# Altium PCB ay_and_dac_vm1.PcbDoc
Units mm, origin at the board's own origin, x right, y up, seen from the top; angles counter-clockwise.
Board outline 100 x 200 mm, 2 copper layers (Top Layer, Bottom Layer); 54 components, 122 nets, 529 pads, 0 vias.
Unrouted connection lines stored in the file: 286.
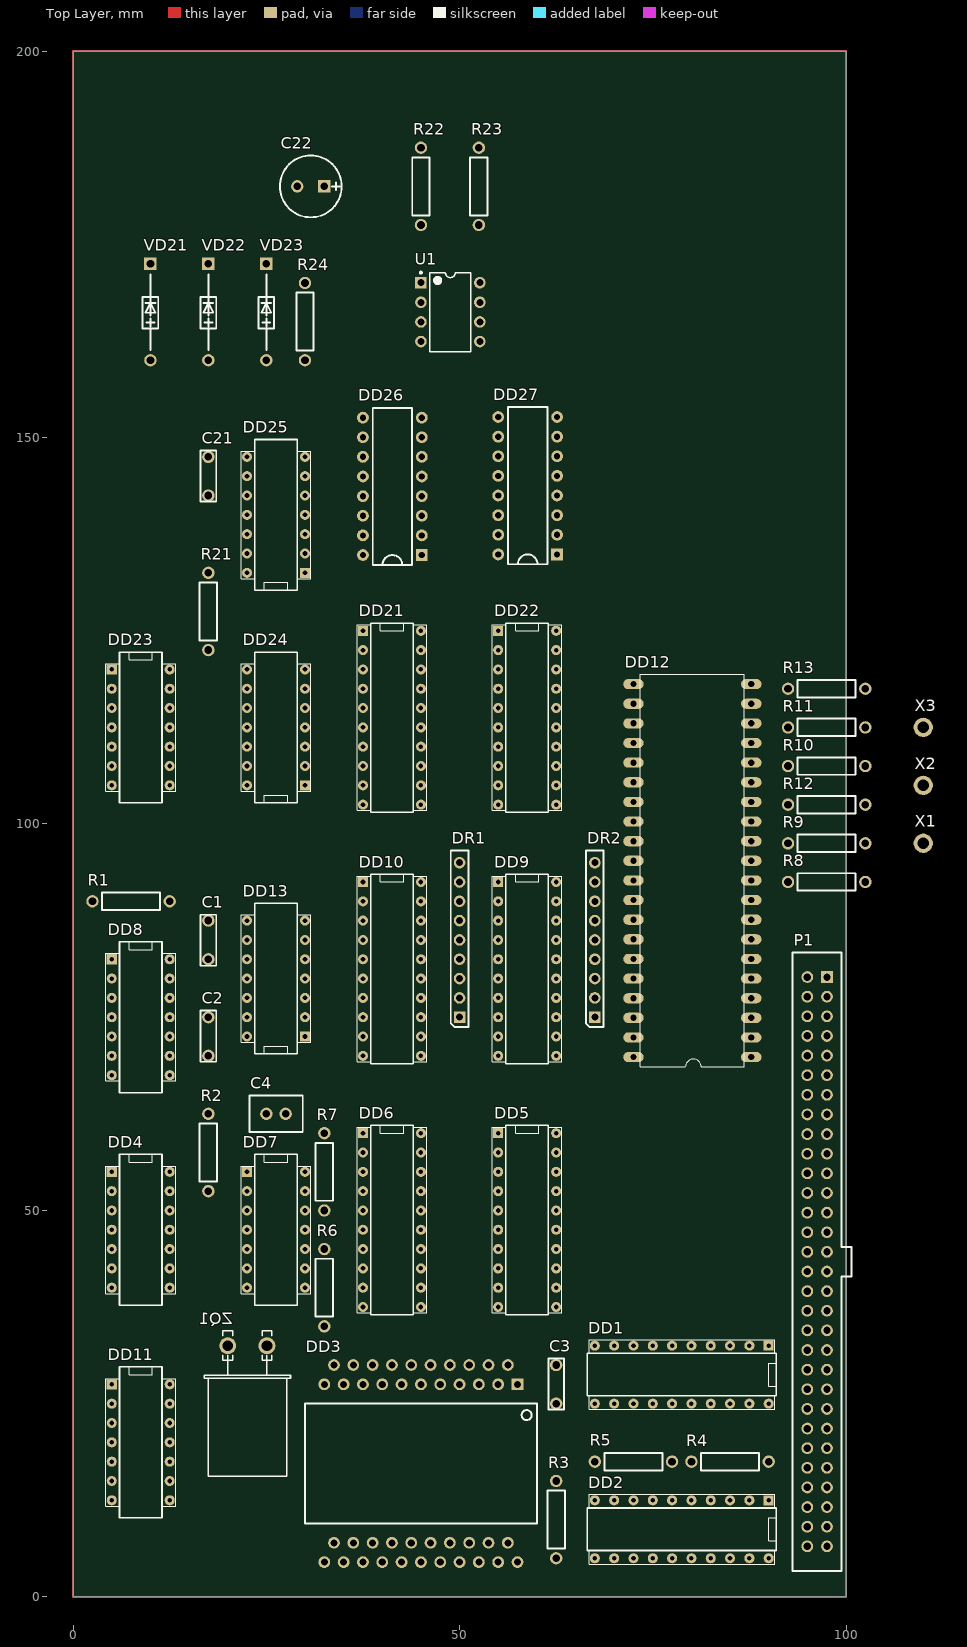
[diagram p0: Top Layer view]
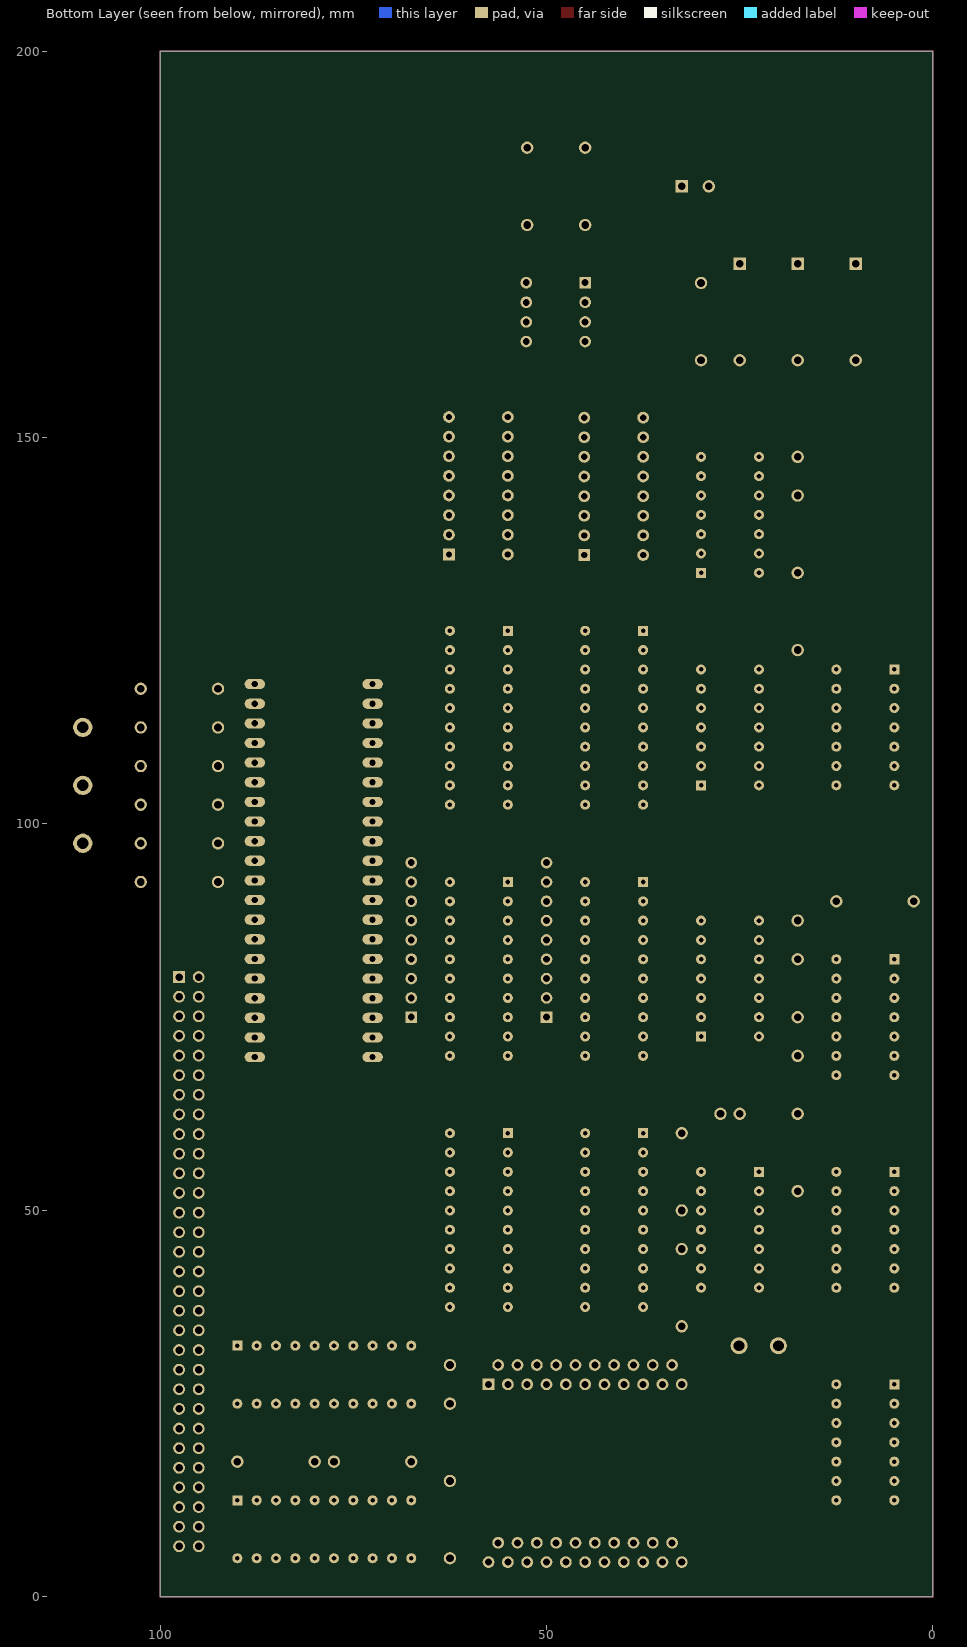
[diagram p1: Bottom Layer view, seen from below]

## Layer stack, top to bottom
Top Solder: solder mask 0.0102, Solder Resist, Dk 3.5
Top Layer: signal copper 0.0356
Dielectric 1: dielectric 0.32, FR-4, Dk 4.8
Bottom Layer: signal copper 0.0356
Bottom Solder: solder mask 0.0102, Solder Resist, Dk 3.5

## Board outline
0,0 0,200 100,200 100,0

## Design rules (kind name [scope] priority, off if disabled: settings)
Clearance [All] p1: gap=0.254 ignorepadtopadclearanceinfootprint=FALSE except(0: Arc-Hole Track-Hole SMDPad-Hole THPad-Hole Via-Hole Fill-Hole Poly-Hole Region-Hole Text-Hole)
PolygonConnect [All] p1: connectstyle=Relief reliefconductorwidth=0.254 reliefentries=4 polygonreliefangle="90 Angle" airgapwidth=0.254
RoutingVias [All] p1: holewidth=0.711 width=1.27 viastyle="Through Hole" minholewidth=0.711 minwidth=1.27 maxholewidth=0.711 maxwidth=1.27
SolderMaskExpansion [All] p1: expansion=0.102
Width [All] p1: maxlimit=0.254 minlimit=0.254 preferedwidth=0.254
30 further rules are at their usual default settings.

## Components (designator, comment, footprint, x,y, rotation, side; value= is the part's Value field where it differs from the comment)
C1 "K1017-1" K1017-1_K1017-1A 17.5,87.5 r270 top value="200 pF"
C2 "K1017-1" K1017-1_K1017-1A 17.5,70 r90 top value="200 pF"
C3 "K1017-1" K1017-1_K1017-1A 62.5,25 r90 top value="1 uF"
C4 "K1017A" K1017A 25,62.5 r0 top value=82pF
C21 "K1017-1" K1017-1_K1017-1A 17.5,142.5 r90 top value="100 pF"
C22 "ECR-8" ECR-8 32.5,182.5 r180 top value=47uF
DD1 "КР1533АП6" 2140.20-4 90,32.5 r0 top
DD2 "КР1533АП6" 2140.20-4 90,12.5 r0 top
DD3 "К1801ВМ1" 429-42 57.5,27.5 r270 top
DD4 "КР1533ЛЕ4" 2101.14-1 5,55 r90 top
DD5 "КР1533ИР23" 2140.20-4 55,60 r90 top
DD6 "КР1533ИР23" 2140.20-4 37.5,60 r90 top
DD7 "КР1533ЛН1" 2101.14-1 22.5,55 r90 top
DD8 "КР1533ЛН2" 2101.14-1 5,82.5 r90 top
DD9 "КР1533ИР23" 2140.20-4 55,92.5 r90 top
DD10 "КР1533ИР23" 2140.20-4 37.5,92.5 r90 top
DD11 "КР1533ЛИ1" 2101.14-1 5,27.5 r90 top
DD12 "AY-3-8910" DIL40 80.12,93.97 r90 top
DD13 "КР1533ИЕ5" 2101.14-1 30,72.5 r270 top
DD21 "КР1533ИР23" 2140.20-4 37.5,125 r90 top
DD22 "КР1533ИР23" 2140.20-4 55,125 r90 top
DD23 "КР1533ЛЕ4" 2101.14-1 5,120 r90 top
DD24 "КР1533ЛА3" 2101.14-1 30,105 r270 top
DD25 "КР1533ТМ2" 2101.14-1 30,132.5 r270 top
DD26 "К572ПА1А" DIP16-3 45.12,134.8 r180 top
DD27 "К572ПА1А" DIP16-3 62.62,134.88 r180 top
DR1 "NR1-4-8M" NR1-4-8M 50,75 r90 top
DR2 "NR1-4-8M" NR1-4-8M 67.5,75 r90 top
P1 "IDC2X30F" IDC60F 97.54,80.2 r270 top
R1 "R0125" R0125_Primary 12.5,90 r180 top value="2 k"
R2 "R0125" R0125_Primary 17.5,62.5 r270 top value="2 k"
R3 "R0125" R0125_Primary 62.5,5 r90 top value=2k
R4 "R0125" R0125_Primary 90,17.5 r180 top value=10k
R5 "R0125" R0125_Primary 67.5,17.5 r0 top value=10k
R6 "R0125" R0125_Primary 32.5,45 r270 top value=750
R7 "R0125" R0125_Primary 32.5,60 r270 top value=1k
R8 "R0125" R0125_Primary 92.5,92.5 r0 top value=1k
R9 "R0125" R0125_Primary 92.5,97.5 r0 top value=2.2k
R10 "R0125" R0125_Primary 92.5,107.5 r0 top value=2.2k
R11 "R0125" R0125_Primary 92.5,112.5 r0 top value=1k
R12 "R0125" R0125_Primary 102.5,102.5 r180 top value=510
R13 "R0125" R0125_Primary 102.5,117.5 r180 top value=510
R21 "R0125" R0125_Primary 17.5,122.5 r90 top value=150
R22 "R0125" R0125_Primary 45,177.5 r90 top value=10k
R23 "R0125" R0125_Primary 52.5,177.5 r90 top value=10k
R24 "R0125" R0125_Primary 30,160 r90 top value=2k
U1 "MC1458P" TI-P8 48.81,166.23 r0 top
VD21 "KD522" VDD10_12.5mm 10,172.5 r90 top
VD22 "KD522" VDD10_12.5mm 17.5,172.5 r90 top
VD23 "KD522" VDD10_12.5mm 25,172.5 r90 top
X1 "KONT-2,5" KONT-2 110,97.5 r270 top value=L
X2 "KONT-2,5" KONT-2 110,105 r270 top value=GND
X3 "KONT-2,5" KONT-2 110,112.5 r270 top value=R
ZQ1 "РК8" МА_РК8(Primary) 20,32.5 r270 top value=14MHz

## Footprints (in the part's own frame and the unit in brackets; to place one, negate y for a bottom-side part, rotate by r counter-clockwise, add the part's x,y. Pads: shape width x height; smd on the part's side, far side on the other; paste and mask are expansions set on the pad)
429-42 [mil]
  rect 60x60 hole 36: 1(0,0)
  round 60 hole 36: 2(-98.43,-49.21) 3(0,-98.43) 4(-98.43,-147.64) 5(0,-196.85) 6(-98.43,-246.06) 7(0,-295.28) 8(-98.43,-344.49) 9(0,-393.7) 10(-98.43,-442.91) 11(0,-492.13) 12(-98.43,-541.34) 13(0,-590.55) 14(-98.43,-639.76) 15(0,-688.98) 16(-98.43,-738.19) 17(0,-787.4) 18(-98.43,-836.61) 19(0,-885.83) 20(-98.43,-935.04) 21(0,-984.25) 22(905.51,-984.25) 23(807.09,-935.04) 24(905.51,-885.83) 25(807.09,-836.61) 26(905.51,-787.4) 27(807.09,-738.19) 28(905.51,-688.98) 29(807.09,-639.76) 30(905.51,-590.55) 31(807.09,-541.34) 32(905.51,-492.13) 33(807.09,-442.91) 34(905.51,-393.7) 35(807.09,-344.49) 36(905.51,-295.28) 37(807.09,-246.06) 38(905.51,-196.85) 39(807.09,-147.64) 40(905.51,-98.43) 41(807.09,-49.21) 42(905.51,0)
  silkscreen extent 98,-1083 709,98
2101.14-1 [mm]
  rect 1.3x1.3 hole 0.6: 1(0,0)
  round 1.3 hole 0.6: 2(-2.5,0) 3(-5,0) 4(-7.5,0) 5(-10,0) 6(-12.5,0) 7(-15,0) 8(-15,-7.5) 9(-12.5,-7.5) 10(-10,-7.5) 11(-7.5,-7.5) 12(-5,-7.5) 13(-2.5,-7.5) 14(0,-7.5)
  silkscreen extent -17.25,-8.25 2.25,0.75
2140.20-4 [mm]
  rect 1.3x1.3 hole 0.6: 1(0,0)
  round 1.3 hole 0.6: 2(-2.5,0) 3(-5,0) 4(-7.5,0) 5(-10,0) 6(-12.5,0) 7(-15,0) 8(-17.5,0) 9(-20,0) 10(-22.5,0) 11(-22.5,-7.5) 12(-20,-7.5) 13(-17.5,-7.5) 14(-15,-7.5) 15(-12.5,-7.5) 16(-10,-7.5) 17(-7.5,-7.5) 18(-5,-7.5) 19(-2.5,-7.5) 20(0,-7.5)
  silkscreen extent -23.5,-8.25 1,0.75
DIL40 [mil]
  oval 52x104 hole 32: 1(-950,-300) 2(-850,-300) 3(-750,-300) 4(-650,-300) 5(-550,-300) 6(-450,-300) 7(-350,-300) 8(-250,-300) 9(-150,-300) 10(-50,-300) 11(50,-300) 12(150,-300) 13(250,-300) 14(350,-300) 15(450,-300) 16(550,-300) 17(650,-300) 18(750,-300) 19(850,-300) 20(950,-300) 21(950,300) 22(850,300) 23(750,300) 24(650,300) 25(550,300) 26(450,300) 27(350,300) 28(250,300) 29(150,300) 30(50,300) 31(-50,300) 32(-150,300) 33(-250,300) 34(-350,300) 35(-450,300) 36(-550,300) 37(-650,300) 38(-750,300) 39(-850,300) 40(-950,300)
  silkscreen extent -1000,-265 1000,265
DIP16-3 [mil]
  rect 60x60 hole 32: 1(0,0)
  round 60 hole 32: 2(0,-100) 3(0,-200) 4(0,-300) 5(0,-400) 6(0,-500) 7(0,-600) 8(0,-700) 9(300,-700) 10(300,-600) 11(300,-500) 12(300,-400) 13(300,-300) 14(300,-200) 15(300,-100) 16(300,0)
  silkscreen extent 50,-750 250,50
ECR-8 [mm]
  rect 1.6x1.6 hole 1: 1(0,0)
  round 1.6 hole 1: 2(3.5,0)
  silkscreen extent -2.25,-4 5.75,4
IDC60F [mil]
  rect 60x60 hole 38: 1(0,0)
  round 60 hole 38: 2(0,-100) 3(100,0) 4(100,-100) 5(200,0) 6(200,-100) 7(300,0) 8(300,-100) 9(400,0) 10(400,-100) 11(500,0) 12(500,-100) 13(600,0) 14(600,-100) 15(700,0) 16(700,-100) 17(800,0) 18(800,-100) 19(900,0) 20(900,-100) 21(1000,0) 22(1000,-100) 23(1100,0) 24(1100,-100) 25(1200,0) 26(1200,-100) 27(1300,0) 28(1300,-100) 29(1400,0) 30(1400,-100) 31(1500,0) 32(1500,-100) 33(1600,0) 34(1600,-100) 35(1700,0) 36(1700,-100) 37(1800,0) 38(1800,-100) 39(1900,0) 40(1900,-100) 41(2000,0) 42(2000,-100) 43(2100,0) 44(2100,-100) 45(2200,0) 46(2200,-100) 47(2300,0) 48(2300,-100) 49(2400,0) 50(2400,-100) 51(2500,0) 52(2500,-100) 53(2600,0) 54(2600,-100) 55(2700,0) 56(2700,-100) 57(2800,0) 58(2800,-100) 59(2900,0) 60(2900,-100)
  silkscreen extent -125,-175 3025,125
K1017-1_K1017-1A [mm]
  round 1.6 hole 1: 1(0,0) 2(5,0)
  silkscreen extent -0.76,-1.02 5.84,1.02
K1017A [mm]
  round 1.6 hole 1: 1(0,0) 2(2.5,0)
  silkscreen extent -2.2,-2.33 4.71,2.35
KONT-2 [mm]
  round 2.5 hole 1.5: 1(0,0)
NR1-4-8M [mm]
  rect 1.5x1.5 hole 0.9: 1(0,0)
  round 1.5 hole 0.9: 2(2.5,0) 3(5,0) 4(7.5,0) 5(10,0) 6(12.5,0) 7(15,0) 8(17.5,0) 9(20,0)
  silkscreen extent -1.27,-1.14 21.59,1.14
R0125_Primary [mm]
  round 1.6 hole 1: 1(0,0) 2(10,0)
  silkscreen extent 1.25,-1.12 8.75,1.12
TI-P8 [mm] "DIP, 8-Leads, Body 9.59x6.35mm, Pitch 2.54mm"
  rect 1.5x1.5 hole 0.9: 1(-3.81,3.81)
  round 1.5 hole 0.9: 2(-3.81,1.27) 3(-3.81,-1.27) 4(-3.81,-3.81) 5(3.81,-3.81) 6(3.81,-1.27) 7(3.81,1.27) 8(3.81,3.81)
  silkscreen extent -3.93,-5.1 2.65,5.23, body extent -3.95,-5.07 3.95,5.07, height 5.08
VDD10_12.5mm [mm]
  rect 1.6x1.6 hole 1: 1(0,0)
  round 1.6 hole 1: 2(-12.5,0)
  silkscreen extent -11.19,-1.02 -1.37,1.02
МА_РК8(Primary) [mm]
  round 2.2 hole 1.4: A(0,0) B(0,5.08)
  silkscreen extent -1.91,-3.05 16.89,8.13

## Part data
DD3: library part K1801VM1
DD26 DD27: library part К572ПА1
P1: "IDC Header"
U1: "Dual General-Purpose Operational Amplifier, 10 to 30 V, 0 to 70 degC, 8-pin DIP (P8), Pb-Free (RoHS)", Manufacturer="Texas Instruments", Supplier Part Number 1=296-1403-5-ND, Total Supply Voltage(Max)(+5V is 5, +/-5V is 10)=30, Total Supply Voltage(Min)(+5V is 5, +/-5V is 10)=10, CMRR(Min)(dB)=70, Code_JEDEC=MS-001, ComponentLink1Description="Manufacturer URL", ComponentLink1URL=http://www.ti.com/, ComponentLink2Description=Datasheet, ComponentLink2URL=http://www.ti.com/lit/ds/symlink/mc1458.pdf, ComponentLink3Description="Package Specification", ComponentLink3URL=http://www.ti.com/litv/pdf/mpdi001b, DatasheetVersion=SLOS069C, Eco-Plan="Pb-Free (RoHS)", GBW(Typ)(MHz)=1, IIB(Max)(pA)=500000, Iq per channel(Max)(mA)=2.8, Mounting Technology="Through Hole", Number of Channels=2, PackageDescription="8-Pin Plastic In-Line, Body 9.59 x 6.35 mm, Pitch 2.54 mm", PackageReference=P8, PackageVersion="4040082/E, 04/2010", PartNumber=MC1458P, Slew Rate(Typ)(V/us)=0.5, Sub Family="General Purpose Amplifier, High Supply Voltage Amplifier (>=30V)", Supplier 1=Digi-Key, Supplier 2=Farnell, Supplier 3=Newark, Supplier 4=Mouser, Supplier Part Number 2=1103044, Supplier Part Number 3=60K6206, Supplier Part Number 4=595-MC1458P, Vio (25C)(Max)(mV)=6, Vn at 1kHz(Typ)(nV/rtHz)=45
ZQ1: "Capacitor"
C1 C2 C3 C21: PDIF_TY=11213
R1 R2 R3 R4 R5 R6 R7 R8 R9 R10 R11 R12 R13 R21 R22 R23 R24: PDIF_TY=11107

## Nets (pads, with @x,y where several pads share a name; then routed paths per layer and width w, separated by ;. In a path a pad name is that pad's centre, name@x,y a point inside that pad or via, vN(x,y) a via of type N, cw(c..) or ccw(c..) an arc to the next point about the centre after c; other vN are vias at no path point)
+5: C3.1 DD3.42 DD12.25 DD12.28 DD12.40 DD25.1 DD25.4 DD26.15 DD27.15 DR1.1 DR2.1 R1.2 R2.2 R3.2 R4.1 R5.1 R24.2 U1.8
ACLO: DD3.30 P1.34
AD0: DD1.18 DD3.9 DD5.3 DD9.2 DD22.3 DD25.2
AD1: DD1.17 DD3.10 DD5.4 DD9.5 DD22.4
AD2: DD1.16 DD3.11 DD5.7 DD9.6 DD22.7
AD3: DD1.15 DD3.12 DD5.8 DD9.9 DD22.8
AD4: DD1.14 DD3.13 DD5.13 DD9.12 DD22.13
AD5: DD1.13 DD3.14 DD5.14 DD9.15 DD22.14
AD6: DD1.12 DD3.15 DD5.17 DD9.16 DD22.17
AD7: DD1.11 DD3.16 DD5.18 DD9.19 DD22.18
AD8: DD2.18 DD3.17 DD6.3 DD10.2 DD21.3
AD9: DD2.17 DD3.18 DD6.4 DD10.5 DD21.4
AD10: DD2.16 DD3.19 DD6.7 DD10.6 DD21.7
AD11: DD2.15 DD3.20 DD6.8 DD10.9 DD21.8
AD12: DD2.14 DD3.22 DD6.13 DD10.12 DD21.13
AD13: DD2.13 DD3.23 DD6.14 DD10.15 DD21.14
AD14: DD2.12 DD3.24 DD6.17 DD10.16 DD21.17
AD15: DD2.11 DD3.25 DD6.18 DD10.19 DD21.18
BC1: DD11.3 DD12.29
BDIR: DD4.6 DD5.11 DD6.11 DD11.2 DD12.27
D0: DD22.2 DD27.11
D1: DD22.5 DD27.10
D2: DD22.6 DD27.9
D3: DD22.9 DD27.8
D4: DD22.12 DD27.7
D5: DD22.15 DD27.6
D6: DD22.16 DD27.5
D7: DD22.19 DD27.4
D8: DD21.2 DD26.11
D9: DD21.5 DD26.10
D10: DD21.6 DD26.9
D11: DD21.9 DD26.8
D12: DD21.12 DD26.7
D13: DD21.15 DD26.6
D14: DD21.16 DD26.5
D15: DD21.19 DD26.4
DCLO: DD3.29 P1.32
DIN: DD3.38 DD4.10
DOUT: DD3.37 DD4.4 DD7.4 DD23.2
eAD0: DD1.2 P1.27
eAD1: DD1.3 P1.29
eAD2: DD1.4 P1.31
eAD3: DD1.5 P1.33
eAD4: DD1.6 P1.35
eAD5: DD1.7 P1.37
eAD6: DD1.8 P1.39
eAD7: DD1.9 P1.41
eAD8: DD2.2 P1.43
eAD9: DD2.3 P1.45
eAD10: DD2.4 P1.47
eAD11: DD2.5 P1.49
eAD12: DD2.6 P1.51
eAD13: DD2.7 P1.53
eAD14: DD2.8 P1.55
eAD15: DD2.9 P1.57
eDIN: DD4.13 P1.7
eDOUT: DD8.5 P1.3
eRPLY: DD8.4 P1.5
eSYNC: DD4.2 P1.9
GND: C1.2 C2.2 C3.2 C21.2 C22.2 DD1.19 DD2.19 DD3.2 DD3.5 DD3.21 DD5.1 DD6.1 DD12.1 DD12.24 DD21.1 DD22.1 DD26.3 DD26.12 DD26.13 DD27.3 DD27.12 DD27.13 R12.2 R13.2 U1.4 VD21.1 X2.1
hDA0: DD6.2 DD10.3 DR1.2
hDA1: DD6.5 DD10.4 DR1.3
hDA2: DD6.6 DD10.7 DR1.4
hDA3: DD6.9 DD10.8 DR1.5
hDA4: DD6.12 DD10.13 DR1.6
hDA5: DD6.15 DD10.14 DR1.7
hDA6: DD6.16 DD10.17 DR1.8
hDA7: DD6.19 DD10.18 DR1.9
INIT: DD3.34 DD12.23 P1.25
lDA0: DD5.2 DD9.3 DD12.37 DR2.2
lDA1: DD5.5 DD9.4 DD12.36 DR2.3
lDA2: DD5.6 DD9.7 DD12.35
lDA3: DD5.9 DD9.8 DD12.34 DR2.4 DR2.5
lDA4: DD5.12 DD9.13 DD12.33 DR2.6
lDA5: DD5.15 DD9.14 DD12.32 DR2.7
lDA6: DD5.16 DD9.17 DD12.31 DR2.8
lDA7: DD5.19 DD9.18 DD12.30 DR2.9
NetC1_1: C1.1 DD8.2 DD8.3 R1.1
NetC2_1: C2.1 DD7.3 DD8.6 R2.1
NetC4_1: C4.1 DD7.9 R6.1
NetC4_2: C4.2 DD7.10 DD7.13 R7.2
NetC21_1: C21.1 DD25.3 R21.2
NetC22_1: C22.1 DD26.14 DD27.14 R24.1 VD23.2
NetDD1_1: DD1.1 DD2.1 DD7.2
NetDD3_1: DD3.1 P1.58
NetDD3_3: DD3.3 DD3.6 DD3.31 DD3.32 DD3.33 DD3.35
NetDD3_26: DD3.26 R5.2
NetDD3_27: DD3.27 R4.2
NetDD3_39: DD3.39 DD4.1 DD8.1 R3.1
NetDD4_8: DD4.8 DD7.5 DD9.11 DD10.11
NetDD4_12: DD4.12 DD7.1
NetDD7_6: DD7.6 DD9.1 DD10.1
NetDD7_8: DD7.8 R6.2 ZQ1.B
NetDD7_11: DD7.11 R7.1 ZQ1.A
NetDD7_12: DD7.12 DD13.14
NetDD12_3: DD12.3 R9.1 R10.1
NetDD12_4: DD12.4 R8.1
NetDD12_22: DD12.22 DD13.2 DD13.3 DD13.11
NetDD12_38: DD12.38 R11.1
NetDD21_11: DD21.11 DD24.3
NetDD22_11: DD22.11 DD24.6
NetDD23_6: DD23.6 DD24.9 DD24.12
NetDD23_8: DD23.8 R21.1
NetDD23_12: DD23.12 DD24.2 DD24.5
NetDD24_1: DD24.1 DD24.8
NetDD24_4: DD24.4 DD24.11
NetDD24_10: DD24.10 DD25.5
NetDD24_13: DD24.13 DD25.6
NetDD26_1: DD26.1 U1.3
NetDD26_2: DD26.2 U1.2
NetDD26_16: DD26.16 R22.1 U1.1
NetDD27_1: DD27.1 U1.5
NetDD27_2: DD27.2 U1.6
NetDD27_16: DD27.16 R23.1 U1.7
NetR8_2: R8.2 R9.2 R12.1 X1.1
NetR10_2: R10.2 R11.2 R13.1 X3.1
NetVD21_2: VD21.2 VD22.1
NetVD22_2: VD22.2 VD23.1
SEL1: DD3.7 DD23.1
SEL2: DD3.8 DD4.3 DD4.9
SYNC: DD3.41 DD4.5 DD4.11 DD23.9 DD23.10 DD23.11 DD23.13
WTBT: DD3.40 DD11.1 DD23.3 DD23.4 DD23.5 P1.11
pads on no net: DD1.10 DD1.20 DD2.10 DD2.20 DD3.4 DD3.28 DD3.36 DD4.7 DD4.14 DD5.10 DD5.20 DD6.10 DD6.20 DD7.7 DD7.14 DD8.7 DD8.8 DD8.9 DD8.10 DD8.11 DD8.12 DD8.13 DD8.14 DD9.10 DD9.20 DD10.10 DD10.20 DD11.4 DD11.5 DD11.6 DD11.7 DD11.8 DD11.9 DD11.10 DD11.11 DD11.12 DD11.13 DD11.14 DD12.2 DD12.5 DD12.6 DD12.7 DD12.8 DD12.9 DD12.10 DD12.11 DD12.12 DD12.13 DD12.14 DD12.15 DD12.16 DD12.17 DD12.18 DD12.19 DD12.20 DD12.21 DD12.26 DD12.39 DD13.1 DD13.4 DD13.5 DD13.6 DD13.7 DD13.8 DD13.9 DD13.10 DD13.12 DD13.13 DD21.10 DD21.20 DD22.10 DD22.20 DD23.7 DD23.14 DD24.7 DD24.14 DD25.7 DD25.8 DD25.9 DD25.10 DD25.11 DD25.12 DD25.13 DD25.14 P1.1 P1.2 P1.4 P1.6 P1.8 P1.10 P1.12 P1.13 P1.14 P1.15 P1.16 P1.17 P1.18 P1.19 P1.20 P1.21 P1.22 P1.23 P1.24 P1.26 P1.28 P1.30 P1.36 P1.38 P1.40 P1.42 P1.44 P1.46 P1.48 P1.50 P1.52 P1.54 P1.56 P1.59 P1.60 R22.2 R23.2
copper on no net: | length 600
  Top Layer w0.254: 0,0 100,0 100,200 0,200 0,0